# Altium PCB PCB1.PcbDoc
Units mm, origin at the board's own origin, x right, y up, seen from the top; angles counter-clockwise.
Board outline 215.9 x 100.58 mm, 2 copper layers (Top Layer, Bottom Layer); 27 components, 29 nets, 141 pads, 21 vias.
Unrouted connection lines stored in the file: 6.
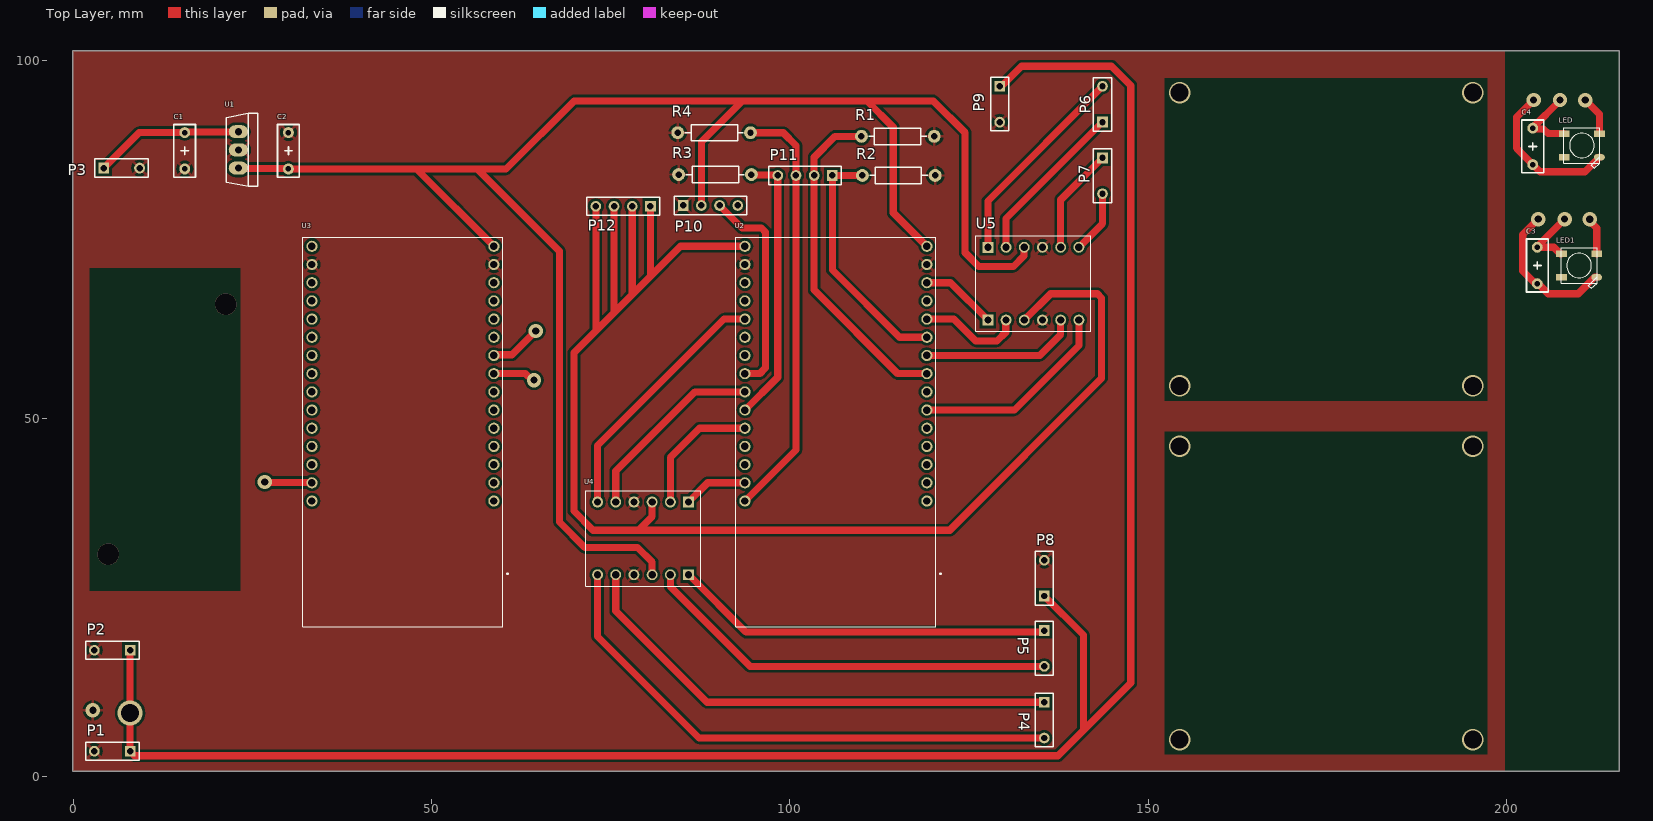
[diagram p0: Top Layer view]
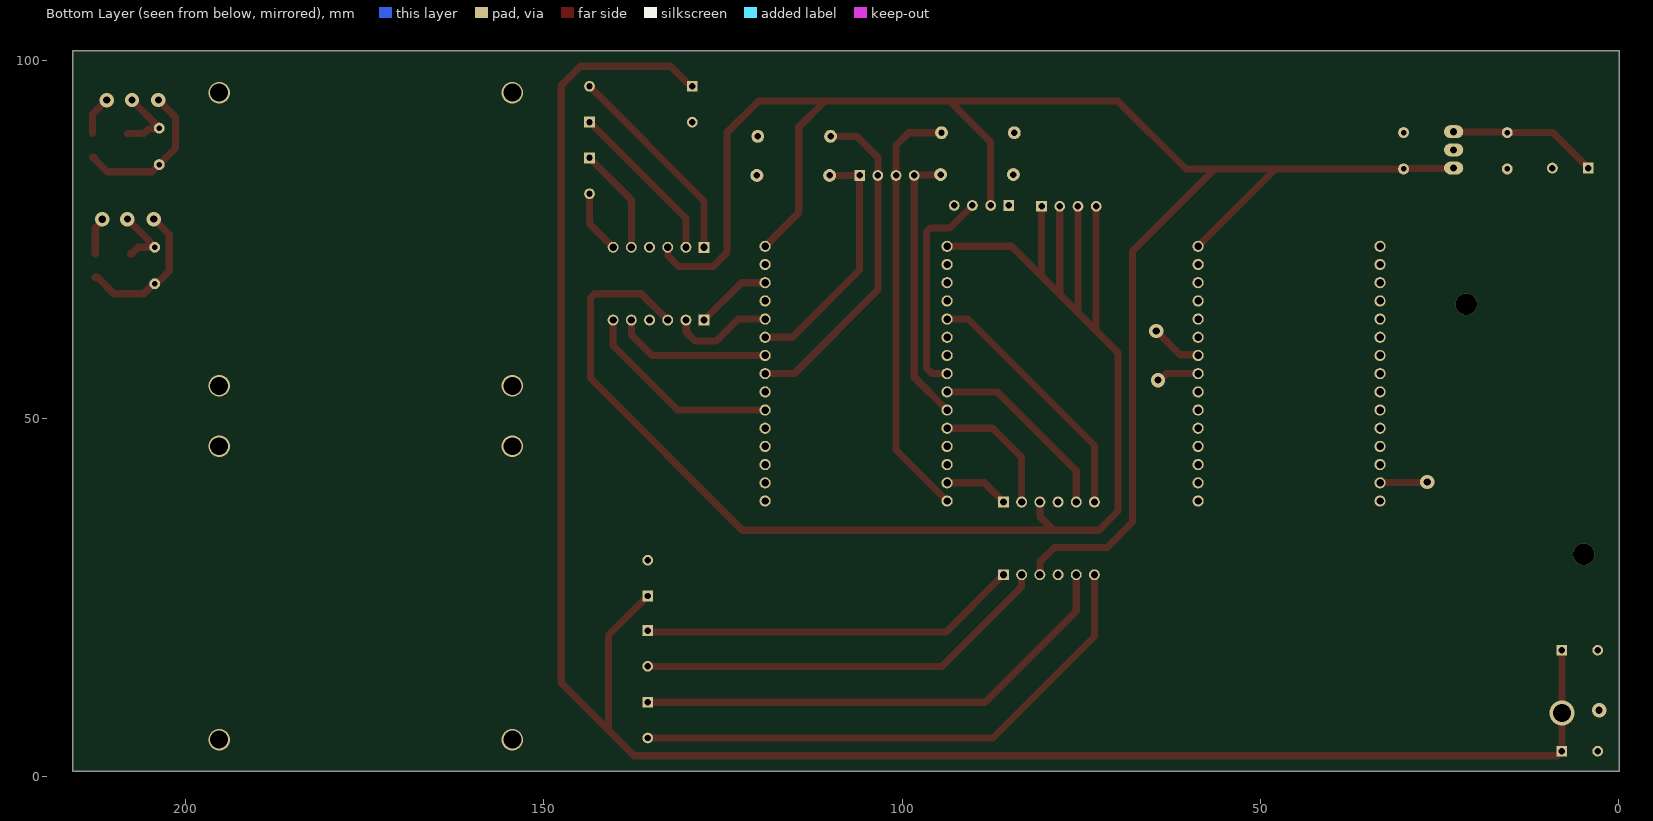
[diagram p1: Bottom Layer view, seen from below]

## Layer stack, top to bottom
Top Solder: solder mask 0.0102, Solder Resist, Dk 3.5
Top Layer: signal copper 0.0356
Dielectric 1: dielectric 0.32, FR-4, Dk 4.8
Bottom Layer: signal copper 0.0356
Bottom Solder: solder mask 0.0102, Solder Resist, Dk 3.5

## Board outline
215.773,0.762 -0.127,0.762 -0.127,101.346 215.773,101.346

## Design rules (kind name [scope] priority, off if disabled: settings)
Clearance [All] p1: gap=0.35 ignorepadtopadclearanceinfootprint=FALSE except(0: Arc-Text Arc-Hole Track-Text Track-Hole SMDPad-Text SMDPad-Hole THPad-Text THPad-Hole Via-Text Via-Hole Fill-Text Fill-Hole Poly-Text Poly-Hole Region-Text Region-Hole Text-Text Text-Hole; 0.7: Arc-Arc Arc-Track Track-Track)
ComponentClearance [All] p1: gap=0.3 collisioncheckmode=3 verticalgap=0.254 showdistances=FALSE
HoleSize HoleSize_1 [All] p1: absolutevalues=TRUE maxlimit=1 minlimit=0.6 maxpercent=80.000 minpercent=20.000
HoleToHoleClearance [All] p1: gap=0.1 allowstackedmicrovias=TRUE
MinimumSolderMaskSliver [All] p1: minsoldermaskwidth=0.05
PolygonConnect [All] p1: connectstyle=Relief reliefconductorwidth=0.4 reliefentries=4 polygonreliefangle="90 Angle" airgapwidth=0.4
RoutingVias [All] p1: holewidth=0.9 width=2 viastyle="Through Hole" minholewidth=0.9 minwidth=2 maxholewidth=0.9 maxwidth=2
SilkToSilkClearance [All] p1: silktosilkclearance=0
SilkToSolderMaskClearance [IsPad] p1: minsilkscreentomaskgap=0 clearancetoexposedcopper=TRUE
SolderMaskExpansion [All] p1: expansion=0.102 istentingtop=FALSE
SupplyNets "Schematic Supply Nets_6" [InNet('+3.3V')] p1: voltage=0.000
SupplyNets "Schematic Supply Nets_4" [InNet('GND')] p2: voltage=0.000
SupplyNets "Schematic Supply Nets_3" [InNet('+6V')] p3: voltage=0.000
SupplyNets "Schematic Supply Nets_2" [InNet('VCC')] p4: voltage=0.000
SupplyNets "Schematic Supply Nets" [InNet('+5V')] p5: voltage=0.000
Width [All] p1: maxlimit=2 minlimit=0.5 preferedwidth=1 minimp=50.000000 maximp=50.000000 favimp=50.000000
24 further rules are at their usual default settings.

## Components (designator, comment, footprint, x,y, rotation, side; value= is the part's Value field where it differs from the comment)
C1 "Cap Film 0.1uF" "Cap Film 0.1uF" 15.494,87.391 r90 top
C2 "Cap Film 0.1uF" "Cap Film 0.1uF" 29.972,87.391 r270 top
C3 "Cap Film 0.1uF" "Cap Film 0.1uF" 204.343,71.374 r90 top
C4 "Cap Film 0.1uF" "Cap Film 0.1uF" 203.708,88.011 r90 top
LED "WS2812B" WS2812B-LED 210.566,88.138 r180 top
LED1 "WS2812B" WS2812B-LED 210.185,71.374 r180 top
P1 "Header 1x2" KRE1X2 7.874,3.556 r180 top
P2 "Header 1x2" KRE1X2 7.874,17.653 r180 top
P3 "Header 1x2" KRE1X2 4.191,84.978 r0 top
P4 "Header 1x2" KRE1X2 135.509,10.406 r270 top
P5 "Header 1x2" KRE1X2 135.509,20.406 r270 top
P6 "Header 1x2" KRE1X2 143.637,91.393 r90 top
P7 "Header 1x2" KRE1X2 143.637,86.393 r270 top
P8 "Header 1x2" KRE1X2 135.509,25.226 r90 top
P9 "Header 1x2" KRE1X2 129.286,96.393 r270 top
P10 "Header 1x4" HDR1X4 85.09,79.756 r0 top
P11 "Header 1x4" HDR1X4 105.918,83.947 r180 top
P12 "Header 1x4" HDR1X4 80.518,79.629 r180 top
R1 "4x10K" "RES 10K 1/4W CARBON FILM" 115.062,89.408 r180 top
R2 "RES 10K 1/4W CARBON FILM" "RES 10K 1/4W CARBON FILM" 115.189,83.947 r180 top
R3 "RES 10K 1/4W CARBON FILM" "RES 10K 1/4W CARBON FILM" 89.535,84.074 r0 top
R4 "RES 10K 1/4W CARBON FILM" "RES 10K 1/4W CARBON FILM" 89.408,89.916 r0 top
U1 "L7805" TO220AB 22.987,87.518 r270 top
U2 "ESP32-DEVKITC-32D" "MODULE_ESP32-DEVKITC-32D - duplicate" 106.411,48.093 r180 top
U3 "ESP32-DEVKITC-32D" "MODULE_ESP32-DEVKITC-32D - duplicate" 45.959,48.093 r180 top
U4 "Logic Level Shifter" CONV_BOB-12009 79.487,33.274 r270 top
U5 "Logic Level Shifter" CONV_BOB-12009 133.985,68.834 r90 top

## Footprints (in the part's own frame and the unit in brackets; to place one, negate y for a bottom-side part, rotate by r counter-clockwise, add the part's x,y. Pads: shape width x height; smd on the part's side, far side on the other; paste and mask are expansions set on the pad)
"Cap Film 0.1uF" [mil] "Cap Film 0.1uF"
  round 60 hole 30: 1(100,0) 2(-100,0)
  silkscreen extent -145,-60 145,60, body extent -144,-60 144,58, height 236
CONV_BOB-12009 [mil]
  round 60 hole 40: GND_1(200,-50) GND_2(-200,-50) HV(200,50) HV2(200,150) HV3(200,-150) HV4(200,-250) LV(-200,50) LV2(-200,150) LV3(-200,-150) LV4(-200,-250)
  rect 60x60 / inner round 60 / far side rect 60x60 hole 40: HV1(200,250) LV1(-200,250)
  silkscreen extent -262,-316 262,316, body extent -262,-316 262,316, height 110
HDR1X4 [mm]
  rect 1.5x1.5 hole 0.9: 1(0,0)
  round 1.5 hole 0.9: 2(2.54,0) 3(5.08,0) 4(7.62,0)
  silkscreen extent -1.27,-1.27 8.89,1.27
KRE1X2 [mm]
  rect 1.5x1.5 hole 0.9: 1(0,0)
  round 1.5 hole 0.9: 2(5,0)
  silkscreen extent -1.27,-1.27 6.22,1.27
"MODULE_ESP32-DEVKITC-32D - duplicate" [mm]
  round 1.56 hole 1.04: J2-5(-12.7,9.6) J2-6(-12.7,7.06) J2-7(-12.7,4.52) J2-8(-12.7,1.98) J2-9(-12.7,-0.56) J2-10(-12.7,-3.1) J2-11(-12.7,-5.64) J2-12(-12.7,-8.18) J2-13(-12.7,-10.72) J2-14(-12.7,-13.26) J2-15(-12.7,-15.8) J2-16(-12.7,-18.34) J2-17(-12.7,-20.88) J2-18(-12.7,-23.42) J2-19(-12.7,-25.96) J3-5(12.7,9.6) J3-6(12.7,7.06) J3-7(12.7,4.52) J3-8(12.7,1.98) J3-9(12.7,-0.56) J3-10(12.7,-3.1) J3-11(12.7,-5.64) J3-12(12.7,-8.18) J3-13(12.7,-10.72) J3-14(12.7,-13.26) J3-15(12.7,-15.8) J3-16(12.7,-18.34) J3-17(12.7,-20.88) J3-18(12.7,-23.42) J3-19(12.7,-25.96)
  silkscreen extent -14.7,-27.25 13.95,27.15, body extent -13.97,-27.9 13.97,27.2, height 6.69
"RES 10K 1/4W CARBON FILM" [mm]
  round 1.8 hole 0.9: 1(-5.08,0) 2(5.08,0)
  silkscreen extent -4.06,-1.14 4.06,1.14, body extent -5.47,-1.27 5.47,1.27, height 3.27
TO220AB [mm]
  oval 1.8x2.7 hole 1: 1(-2.54,0) 2(0,0) 3(2.54,0)
  silkscreen extent -5.1,-1.7 5.1,2.7, body extent -5.15,-1.78 5.15,2.73, height 19.34
WS2812B-LED [mm]
  rect 1.5x0.9 smd: 1-VDD(2.45,-1.65) 2-DOUT(2.45,1.65) 4-DIN(-2.45,-1.65)
  oval 1.5x0.9 smd: 3-GND(-2.45,1.65)
  silkscreen extent -2.5,-2.5 2.5,3.2

## Part data
C1 C2 C3 C4: library part "Cap Film 0.1uF - B32529C104K", "Cap Film 0.1uF 63V PET 10% (7.2 X 2.5 X 6.5mm) Radial 5mm 125C Bulk", Capacitance=100nF, Case/Package=Radial, Dielectric=PET, Insulation Resistance=15GR, Manufacturer="TDK EPCOS", Manufacturer Part Number=B32529C104K, Max Operating Temperature=125°C, Min Operating Temperature=-55°C, Package Quantity=2000, Supplier Part Number 1=21C0469, Tolerance=10%, Voltage Rating=63V, Voltage Rating (AC)=40V, ComponentLink1Description=http://www.farnell.com/datasheets/8708.pdf?src-supplier=Element14, ComponentLink1URL=http://www.farnell.com/datasheets/8708.pdf?src-supplier=Element14, ComponentLink2Description=https://www.distrelec.biz/Web/Downloads/_t/ds/b3252x_eng_tds.pdf?mime=application%2Fpdf&src-supplier=Distrelec, ComponentLink2URL=https://www.distrelec.biz/Web/Downloads/_t/ds/b3252x_eng_tds.pdf?mime=application%2Fpdf&src-supplier=Distrelec, ComponentLink3Description=http://www.farnell.com/datasheets/1955213.pdf?src-supplier=Farnell, ComponentLink3URL=http://www.farnell.com/datasheets/1955213.pdf?src-supplier=Farnell, ComponentLink4Description=https://www.verical.com/server-webapp/html/getDatasheet?partID=117180&src-supplier=Verical, ComponentLink4URL=https://www.verical.com/server-webapp/html/getDatasheet?partID=117180&src-supplier=Verical, ComponentLink5Description=https://produktinfo.conrad.com/datenblaetter/500000-524999/500871-da-01-en-METALLPOLYESTER_KONDENSATOR_0_10_UF.pdf?src-supplier=Conrad, ComponentLink5URL=https://produktinfo.conrad.com/datenblaetter/500000-524999/500871-da-01-en-METALLPOLYESTER_KONDENSATOR_0_10_UF.pdf?src-supplier=Conrad, Contact Plating=Matte,Tin, Depth=2.5mm, Dielectric Material=PET, Height=6.5mm, Height - Seated (Max)=0.256inch, Lead Diameter=0.5mm, Lead Free="Lead Free", Lead Length=6mm, Lead Pitch=5mm, Length=7.2mm, Life (Hours)=200000Hour, Material=PVC,Resin, Mount="PCB,Through Hole", Number of Pins=2, Packaging=Bulk, Pitch=5mm, Radiation Hardening=No, REACH SVHC="No SVHC", Stock 1=0, Supplier 1=Newark, Termination=Radial, Voltage Rating (DC)=63V, Width=2.5mm
LED LED1: "Raspberry Pi HAT _40 pin_ Wheeled Robotics Kit", Package=None, Availability=Unavailable, MF="SparkFun Electronics", MP=WS2812B, Price=None, SnapEDA_Link=https://www.snapeda.com/parts/WS2812B/Worldsemi/view-part/1038297/?ref=snap
P1 P2 P3 P4 P5 P6 P7 P8 P9: Manufacturer=Cromax, Manufacturer Part Number=IMP10327, Supplier Part Number 1="Barra de Pinos Simples 1x40 Macho BMO40-1E", Accessory Type=-, Brand=Cromax, Category="Headers & Wire Housings", ComponentLink1Description=http://loja.multcomercial.com.br/barra-de-pinos-simples-1x40-macho-bmo40-1e.html, ComponentLink1URL=http://loja.multcomercial.com.br/barra-de-pinos-simples-1x40-macho-bmo40-1e.html, Contact Gender="Pin (Male)", Contact Plating=Gold, Contact Type=-, Minimum Order Quantity=1, Mounting Angle=Vertical, Mounting Style="Straight Pin", Number of Positions="40 Position", Number of Rows="1 Row", Pitch="2 mm", Pricing 1="1=1.00, 5=0.20 (BRL)", Product=Headers, Product Category=Accessories, Reeling=False, RoHS="RoHS Compliant", RoHS - Mouser=Y, Row Spacing=-, Stock 1=14, Supplier 1="Mult Comercial", Termination Style="Through Hole", Type=Breakaway
P10 P11 P12: "Headers & Wire Housings 40Pin 2mm Spacing Single Row Hdrs, 5pc", Manufacturer=Cromax, Manufacturer Part Number=IMP10327, Supplier Part Number 1="Barra de Pinos Simples 1x40 Macho BMO40-1E", Accessory Type=-, Brand=Cromax, Category="Headers & Wire Housings", ComponentLink1Description=http://loja.multcomercial.com.br/barra-de-pinos-simples-1x40-macho-bmo40-1e.html, ComponentLink1URL=http://loja.multcomercial.com.br/barra-de-pinos-simples-1x40-macho-bmo40-1e.html, Contact Gender="Pin (Male)", Contact Plating=Gold, Contact Type=-, Minimum Order Quantity=1, Mounting Angle=Vertical, Mounting Style="Straight Pin", Number of Positions="40 Position", Number of Rows="1 Row", Pitch="2 mm", Pricing 1="1=1.00, 5=0.20 (BRL)", Product=Headers, Product Category=Accessories, Reeling=False, RoHS="RoHS Compliant", RoHS - Mouser=Y, Row Spacing=-, Stock 1=14, Supplier 1="Mult Comercial", Termination Style="Through Hole", Type=Breakaway
R1: library part "RES 10K 1/4W CARBON FILM", "RES 10K OHM 1/4W 5% CARBON FILM", Manufacturer=Ty-Ohm, Manufacturer Part Number=CR25, Operating Temperature="-55°C ~ 155°C", Package / Case=Axial, Power (Watts)="0.25W, 1/4W", Resistance (Ohms)=?, Supplier Part Number 1="Resistor de Filme de Carbono 1/4 de Watt CR25 5% de tolerância - 0.22R Ω à 10M Ω", Temperature Coefficient="0/ -500ppm/°C", Tolerance=±5%, Category=Resistors, ComponentLink1Description=http://loja.multcomercial.com.br/resistor-de-1-4-de-watt-cr25-5-de-tolerancia.html, ComponentLink1URL=http://loja.multcomercial.com.br/resistor-de-1-4-de-watt-cr25-5-de-tolerancia.html, Composition="Carbon Film", Features="Flame Retardant Coating, Safety", Height=-, Number of Terminations=2, Packaging="Cut Tape (CT)", Pricing 1="1=0.20 (BRL)", RoHS="RoHS Compliant", Size / Dimension="0.091\" Dia x 0.256\" L (2.30mm x 6.50mm)", Stock 1=617543, Supplier 1="Mult Comercial", Supplier Device Package=Axial
R2 R3 R4: "RES 10K OHM 1/4W 5% CARBON FILM", Manufacturer=Ty-Ohm, Manufacturer Part Number=CR25, Operating Temperature="-55°C ~ 155°C", Package / Case=Axial, Power (Watts)="0.25W, 1/4W", Resistance (Ohms)=?, Supplier Part Number 1="Resistor de Filme de Carbono 1/4 de Watt CR25 5% de tolerância - 0.22R Ω à 10M Ω", Temperature Coefficient="0/ -500ppm/°C", Tolerance=±5%, Category=Resistors, ComponentLink1Description=http://loja.multcomercial.com.br/resistor-de-1-4-de-watt-cr25-5-de-tolerancia.html, ComponentLink1URL=http://loja.multcomercial.com.br/resistor-de-1-4-de-watt-cr25-5-de-tolerancia.html, Composition="Carbon Film", Features="Flame Retardant Coating, Safety", Height=-, Number of Terminations=2, Packaging="Cut Tape (CT)", Pricing 1="1=0.20 (BRL)", RoHS="RoHS Compliant", Size / Dimension="0.091\" Dia x 0.256\" L (2.30mm x 6.50mm)", Stock 1=617543, Supplier 1="Mult Comercial", Supplier Device Package=Axial
U1: library part L7805CV, "Linear Voltage Regulators 5.0V 1.0A Positive", Input Voltage MAX="35 V", Input Voltage MIN="7 V", Manufacturer=STMicroelectronics, Maximum Operating Temperature="+ 125 C", Minimum Operating Temperature="0 C", Output Current="1.5 A", Output Voltage="5 V", Package / Case=TO-220, Supplier Part Number 1="Regulador de Tensão Linear L7805CV 5V 1A Positivo TO220 - STMicroelectronics - Cód. Loja 03", Brand=STMicroelectronics, Category="Linear Voltage Regulators", ComponentLink1Description=http://loja.multcomercial.com.br/regulador-de-tens-o-linear-l7805cv-5v-1a-positivo-stmicroelectronics-cod-loja-03.html, ComponentLink1URL=http://loja.multcomercial.com.br/regulador-de-tens-o-linear-l7805cv-5v-1a-positivo-stmicroelectronics-cod-loja-03.html, Line Regulation="100 mV", Load Regulation="100 mV", Manufacturer Part Number=L7805CV, Minimum Order Quantity=1, Mounting Style="Through Hole", Number of Outputs=1, Output Type=Fixed, Packaging=Tube, Polarity=Positive, Pricing 1="1=1.100 (BRL)", PSRR / Ripple Rejection - Typ="62 dB", Reeling=False, RoHS="RoHS Compliant", RoHS - Mouser=Y, Series=L7805, Standard Pack Qty=1000, Stock 1=26176, Supplier 1="Mult Comercial"
U2 U3: "WiFi Development Tools (802.11) ESP32 General Development Kit, ESP32-WROOM-32D on the board", Package=None, Check_prices=https://www.snapeda.com/parts/ESP32-DEVKITC-32D/Espressif+Systems/view-part/?ref=eda, MF="Espressif Systems", MP=ESP32-DEVKITC-32D, SnapEDA_Link=https://www.snapeda.com/parts/ESP32-DEVKITC-32D/Espressif+Systems/view-part/?ref=snap
U4 U5: "BSS138 - Logic-Level Translator Interface Evaluation Board", Package=None, Check_prices=https://www.snapeda.com/parts/BOB-12009/SparkFun/view-part/?ref=eda, MF=SparkFun, MP=BOB-12009, SnapEDA_Link=https://www.snapeda.com/parts/BOB-12009/SparkFun/view-part/?ref=snap

## Via types
v1: diameter 2, hole 1, Top Layer to Bottom Layer, 10 vias
v2: diameter 3, hole 2.5, Top Layer to Bottom Layer, 8 vias
v3: diameter 3, hole 3, Top Layer to Bottom Layer, 2 vias
v4: diameter 3.5, hole 2.5, Top Layer to Bottom Layer, 1 vias

## Nets (pads, with @x,y where several pads share a name; then routed paths per layer and width w, separated by ;. In a path a pad name is that pad's centre, name@x,y a point inside that pad or via, vN(x,y) a via of type N, cw(c..) or ccw(c..) an arc to the next point about the centre after c; other vN are vias at no path point)
+3.3V: P12.1 P12.2 P12.3 P12.4 U2.J3-19 U4.LV U5.LV | length 219.1
  Top Layer w1: P12.4 72.898,62.245 72.7,62.047 ; P12.3 75.438,64.785 ; P12.2 77.978,67.325 77.907,67.254 ; P12.1 80.518,69.865 80.383,69.731 ; U4.LV 80.757,36.322 78.852,34.417 ; U2.J3-19 84.706,74.053 80.383,69.731 ; U5.LV 136.398,67.437 142.924,67.437 143.51,66.851 143.51,55.626 122.301,34.417 78.852,34.417 ; 72.7,62.047 75.438,64.785 ; 72.7,62.047 69.835,59.182 69.835,37.084 72.502,34.417 78.852,34.417 ; 75.438,64.785 77.907,67.254 ; 77.907,67.254 80.383,69.731
+5V: C2.1 C3.1 C4.1 LED1.1-VDD LED.1-VDD P10.2 U1.3 U2.J2-19 U3.J2-19 U4.HV U5.HV | length 281.6
  Top Layer w1: U1.3 23.05,84.915 29.909,84.915 C2.1 47.752,84.851 ; U3.J2-19 47.861,84.851 47.752,84.851 ; U4.HV 80.757,29.972 78.725,32.004 71.359,32.004 67.818,35.545 67.818,73.359 56.326,84.851 ; P10.2 87.63,88.646 93.345,94.361 ; U2.J2-19 114.427,78.737 114.427,90.678 110.744,94.361 ; U5.HV 132.687,73.886 132.687,72.743 131.191,71.247 126.365,71.247 124.46,73.152 124.46,89.916 120.015,94.361 110.744,94.361 ; v1(207.518,94.488) 207.518,94.424 203.708,90.614 C4.1 203.808,90.451 205.203,90.451 205.866,89.788 LED.1-VDD ; LED1.1-VDD 207.535,73.024 206.645,73.914 C3.1 204.343,74.016 208.153,77.826 v1(208.153,77.851) ; 47.752,84.851 56.326,84.851 ; 56.326,84.851 60.368,84.851 69.878,94.361 93.345,94.361 ; 93.345,94.361 110.744,94.361
+6V: C1.1 P3.1 U1.1 | length 21.1
  Top Layer w1: P3.1 9.144,89.931 C1.1 15.557,89.995 U1.1@23.05,89.995 ; U1.1 U1.1@23.114,89.931
A1: U3.J2-12 | length 6
  Top Layer w1: U3.J2-12 63.09,56.273 63.991,55.372 v1(64.262,55.372)
A2: U3.J2-13 | length 7.3
  Top Layer w1: U3.J2-13 58.766,58.92 61.206,58.92 v1(64.516,62.23)
D1_B: P6.2 U5.HV1 | length 29.1
  Top Layer w1: U5.HV1 127.635,80.391 P6.2
D1_Backward: U2.J2-15 U5.LV2 | length 14.5
  Top Layer w1: U2.J2-15 122.881,63.893 125.941,60.833 128.905,60.833 130.125,62.053 130.125,63.704 U5.LV2
D1_F: P6.1 U5.HV2 | length 23.1
  Top Layer w1: U5.HV2 130.175,77.931 P6.1
D1_Forward: U2.J2-17 U5.LV1 | length 10.7
  Top Layer w1: U2.J2-17 122.416,68.973 U5.LV1
D2_B: P7.2 U5.HV4 | length 8.8
  Top Layer w1: U5.HV4 143.637,77.216 P7.2
D2_Backward: U2.J2-10 U5.LV4 | length 28.5
  Top Layer w1: U2.J2-10 131.33,51.193 140.335,60.198 U5.LV4
D2_F: P7.1 U5.HV3 | length 14.9
  Top Layer w1: U5.HV3 137.795,80.551 P7.1
D2_Forward: U2.J2-13 U5.LV3 | length 21.9
  Top Layer w1: U2.J2-13 134.886,58.813 137.795,61.722 U5.LV3
DA: U3.J3-6 | length 6.6
  Top Layer w1: v1(26.67,41.148) 26.728,41.09 33.201,41.09 U3.J3-6
GND: C1.2 C2.2 C3.2 C4.2 LED1.3-GND LED.3-GND P1.2 P2.2 P3.2 P8.2 P9.2 P10.1 R1.1 R2.1 R3.1 R4.1 U1.2 U2.J2-18 U2.J3-18 U3.J2-18 U3.J3-18 U4.GND_1 U4.GND_2 U5.GND_1 U5.GND_2 | length 42.4
  Top Layer w1: v1(203.835,94.488) 201.422,92.075 201.422,87.757 C4.2 204.724,84.455 210.983,84.455 212.766,86.238 212.766,86.438 212.966,86.438 LED.3-GND ; v1(204.47,77.851) 202.311,75.692 202.311,70.612 203.827,69.096 203.939,69.096 204.201,68.834 204.485,68.834 205.882,67.437 210.058,67.437 212.345,69.724 LED1.3-GND
  other v1: 2.667,9.271
LB: P4.2 U4.HV4 | length 76.9
  Top Layer w1: U4.HV4 73.137,19.573 87.304,5.406 P4.2
Left_Backward: U2.J3-11 U4.LV3 | length 26.9
  Top Layer w1: U4.LV3 75.677,42.672 86.738,53.733 U2.J3-11
Left_Forward: U2.J3-15 U4.LV4 | length 35.8
  Top Layer w1: U4.LV4 73.137,46.228 90.802,63.893 U2.J3-15
LF: P4.1 U4.HV3 | length 70.2
  Top Layer w1: U4.HV3 75.677,23.129 88.4,10.406 P4.1
PB11: P11.2 R1.2 U2.J2-12 | length 46.9
  Top Layer w1: R1.2 106.299,89.408 103.378,86.487 P11.2 103.378,67.945 115.05,56.273 U2.J2-12
PB12: P11.1 R2.2 U2.J2-14 | length 34.7
  Top Layer w1: R2.2@109.956,83.794 R2.2 P11.1 105.918,70.739 115.304,61.353 U2.J2-14
PB21: P11.4 R3.2 U2.J3-10 | length 38.4
  Top Layer w1: U2.J3-10 98.298,55.78 P11.4 98.234,84.01 94.678,84.01 R3.2
PB22: P11.3 R4.2 U2.J3-5 | length 59.7
  Top Layer w1: U2.J3-5 100.838,45.62 P11.3 100.838,88.138 99.06,89.916 R4.2
RB: P5.2 U4.HV2 | length 58.5
  Top Layer w1: U4.HV2 83.297,26.558 94.449,15.406 P5.2
RF: P5.1 U4.HV1 | length 53.1
  Top Layer w1: U4.HV1 86.099,27.932 93.838,20.193 135.296,20.193 P5.1
RGB: LED1.4-DIN LED.4-DIN P10.3 U2.J3-12 | length 40.8
  Top Layer w1: P10.3 93.311,76.615 96.012,76.615 96.598,76.029 96.598,57.101 95.77,56.273 U2.J3-12 ; v1(211.041,94.462) 213.016,92.487 LED.4-DIN ; v1(211.676,77.825) 211.676,77.554 212.635,76.595 LED1.4-DIN
Right_Backward: U2.J3-6 U4.LV1 | length 9
  Top Layer w1: U4.LV1 88.516,41.033 U2.J3-6
Right_Forward: U2.J3-9 U4.LV2 | length 18.3
  Top Layer w1: U4.LV2 83.297,44.577 87.373,48.653 U2.J3-9
VCC: P1.1 P2.1 P8.1 P9.1 | length 283.3
  Top Layer w1: P2.1 P1.1 8.509,2.921 137.414,2.921 140.97,6.477 ; P9.1 129.536,96.643 129.79,96.643 132.334,99.187 144.907,99.187 147.574,96.52 147.574,13.081 140.97,6.477 ; P8.1 140.97,19.765 140.97,6.477
  other v4: 7.874,8.89
pads on no net: LED1.2-DOUT LED.2-DOUT P10.4 U2.J2-5 U2.J2-6 U2.J2-7 U2.J2-8 U2.J2-9 U2.J2-11 U2.J2-16 U2.J3-7 U2.J3-8 U2.J3-13 U2.J3-14 U2.J3-16 U2.J3-17 U3.J2-5 U3.J2-6 U3.J2-7 U3.J2-8 U3.J2-9 U3.J2-10 U3.J2-11 U3.J2-14 U3.J2-15 U3.J2-16 U3.J2-17 U3.J3-5 U3.J3-7 U3.J3-8 U3.J3-9 U3.J3-10 U3.J3-11 U3.J3-12 U3.J3-13 U3.J3-14 U3.J3-15 U3.J3-16 U3.J3-17 U3.J3-19
copper on no net:
  other v2: 154.4,5.175 195.358,5.175 154.4,46.133 195.358,46.133 154.4,54.562 195.358,54.562 154.4,95.52 195.358,95.52
  other v3: 4.801,31.035 21.241,65.993

## Polygon pours and split planes (outlines as drawn)
GND on Top Layer "Top Layer-GND" (solid, pour order 5): -0.127,0.762 199.771,0.762 199.771,101.346 -0.127,101.346

## Other copper
Top Layer:
  pour cut-out: 2.241,25.993 23.241,25.993 23.241,70.993 2.241,70.993
  pour cut-out: 152.358,3.133 197.358,3.133 197.358,48.133 152.358,48.133
  pour cut-out: 152.358,52.52 197.358,52.52 197.358,97.52 152.358,97.52

## Silkscreen, mask and mechanical layers (free items; w line width, h text height)
Mechanical 15:
  lines w0.254: 152.739,2.117 197.739,2.117 197.739,47.117 152.739,47.117 152.739,2.117 ; 152.739,51.504 197.739,51.504 197.739,96.504 152.739,96.504 152.739,51.504

## Text inside footprints (layer, text, board x,y; h text height)
R1: Mechanical 29 "1" at 118.999,90.424 h0.5 r180
R2: Mechanical 29 "1" at 119.126,84.963 h0.5 r180
R3: Mechanical 29 "1" at 85.598,83.058 h0.5
R4: Mechanical 29 "1" at 85.471,88.9 h0.5
U1: Mechanical 29 "1" at 21.587,91.418 h0.7 r270